# Altium PCB Power Controller In ROV V1.0.PcbDoc
Units mil, origin at the board's own origin, x right, y up, seen from the top; angles counter-clockwise.
Board outline 2303.15 x 6301.1 mil, 2 copper layers (Top Layer, Bottom Layer); 26 components, 24 nets, 92 pads, 6 vias.
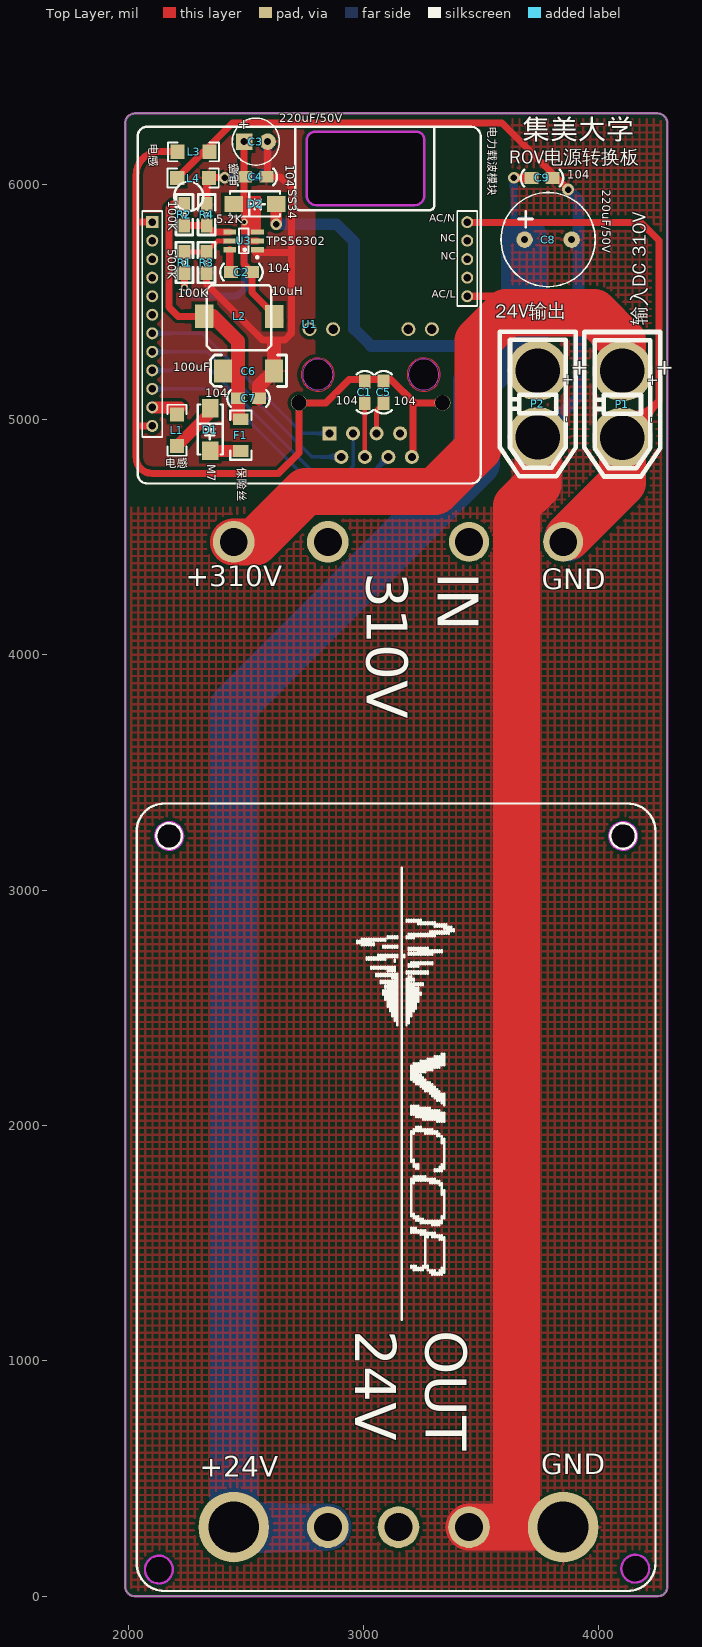
[diagram p0: Top Layer view]
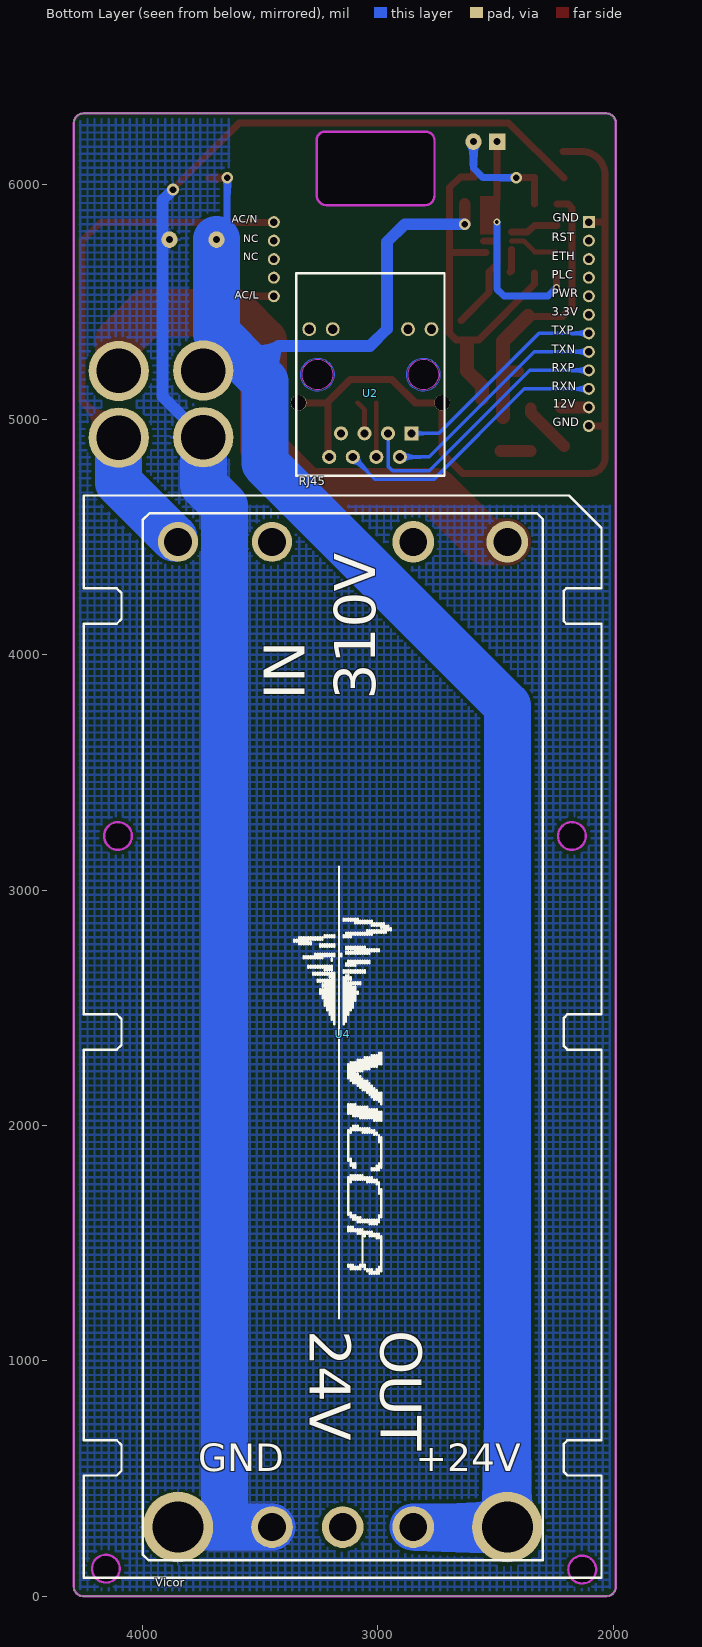
[diagram p1: Bottom Layer view, seen from below]

## Layer stack, top to bottom
Top Solder: solder mask 0.4, Solder Resist, Dk 3.5
Top Layer: signal copper 1.4
Dielectric 1: dielectric 12.6, FR-4, Dk 4.8
Bottom Layer: signal copper 1.4
Bottom Solder: solder mask 0.4, Solder Resist, Dk 3.5

## Board outline
1988.19,39.37 ccw(c2027.56,39.37) 2027.56,0 4251.97,0 ccw(c4251.97,39.37) 4291.34,39.37 4291.34,6260.83 4291.34,6259.84 ccw(c4250.08,6259.84) 4250.08,6301.1 2029.45,6301.1 ccw(c2029.45,6259.84) 1988.19,6259.84
cut-out: 2174.78,3289.45 cw(c2174.78,3230.4) 2233.83,3230.4 cw(c2174.78,3230.4) 2174.78,3171.34 cw(c2174.78,3230.4) 2115.72,3230.4 cw(c2174.78,3230.4)
cut-out: 4103.78,3289.45 cw(c4103.78,3230.4) 4162.83,3230.4 cw(c4103.78,3230.4) 4103.78,3171.34 cw(c4103.78,3230.4) 4044.72,3230.4 cw(c4103.78,3230.4)
cut-out: 2071.8,112.8 ccw(c2130.85,112.8) 2130.85,53.75 ccw(c2130.85,112.8) 2189.91,112.8 ccw(c2130.85,112.8) 2130.85,171.86 ccw(c2130.85,112.8)
cut-out: 4096.4,116.74 ccw(c4155.46,116.74) 4155.46,57.69 ccw(c4155.46,116.74) 4214.51,116.74 ccw(c4155.46,116.74) 4155.46,175.8 ccw(c4155.46,116.74)

## Design rules (kind name [scope] priority, off if disabled: settings)
Clearance [All] p1: gap=15
ComponentClearance [All] p1: gap=0 collisioncheckmode=3 verticalgap=0 showdistances=FALSE
DiffPairsRouting [All] p1: maxlimit=10 minlimit=10 mostfreqgap=10 toplayer_minwidth=15 toplayer_maxwidth=15 toplayer_prefwidth=15 bottomlayer_minwidth=15 bottomlayer_maxwidth=15 bottomlayer_prefwidth=15 maxuncoupledlength=500
PolygonConnect [All] p1: connectstyle=Relief reliefconductorwidth=10 reliefentries=4 polygonreliefangle="90 Angle" airgapwidth=10
RoutingVias [All] p1: holewidth=28 width=50 viastyle="Through Hole" minholewidth=28 minwidth=50 maxholewidth=28 maxwidth=50
SolderMaskExpansion [All] p1: expansion=4
Width [All] p1: maxlimit=500 minlimit=8 preferedwidth=10 minimp=50.000000 maximp=50.000000 favimp=50.000000
28 further rules are at their usual default settings.

## Classes and differential pairs
differential pair EPHY_RX: +EPHY_RX_P -EPHY_RX_N
differential pair EPHY_TX: +EPHY_TX_P -EPHY_TX_N

## Components (designator, comment, footprint, x,y, rotation, side; value= is the part's Value field where it differs from the comment)
C1 "104" 0805C 3005.91,5156.5 r270 top
C2 "104" 0805C 2522.23,5626.75 r180 top
C3 "220uF/50V" RB.1.2 2493.11,6181.1 r0 top
C4 "104" 0805C 2582.68,6031.5 r180 top
C5 "104" 0805C 3085.63,5156.5 r270 top
C6 "100uF" TAJ-C 2403.54,5205.71 r180 top
C7 "104" 0805C 2552.17,5090.55 r180 top
C8 "220uF/50V" RB.2.4 3685.04,5764.76 r0 top
C9 "104" 0805C 3799.21,6026.57 r180 top
D1 "M7" SMA/DO-214AC 2350.39,4874.02 r90 top
D2 "SS34" SMA/DO-214AC 2623.03,5917.32 r180 top
F1 "保险丝" FUSE-1206 2481.3,5000 r270 top
L1 "电感" 1206L 2210.63,4877.95 r90 top
L2 "10uH" 电感 2616.14,5436.02 r180 top
L3 "电感" 1206L 2201.77,6134.84 r0 top
L4 "电感" 1206L 2353.35,6029.53 r180 top
P1 "输入DC 310V" XT60-F#1 4100.39,5197.83 r270 top
P2 "24V输出" XT60-F#2 3741.14,5227.36 r270 top
R1 "500K" 0805R 2238.82,5707.72 r270 top
R2 "100K" 0805R 2240.23,5829.75 r90 top
R3 "100K" 0805R 2334.64,5626.75 r90 top
R4 "5.2K" 0805R 2333.23,5910.72 r270 top
U1 "电力载波模块" 电力载波模块6410 2061.02,6244.09 r0 top locked
U2 "RJ45" RJ45 3264.76,5191.93 r180 bottom
U3 "TPS56302" SOT23-6 2548.23,5720.75 r180 top
U4 "Vicor" vicor 3129,2211 r180 bottom

## Footprints (in the part's own frame and the unit in brackets; to place one, negate y for a bottom-side part, rotate by r counter-clockwise, add the part's x,y. Pads: shape width x height; smd on the part's side, far side on the other; paste and mask are expansions set on the pad)
0805C [mil]
  rect 60x50 smd: 1(-5,0) 2(85,0)
  silkscreen extent -50,-35 131,36, body extent -16,-26 102,29, height 37
0805R [mil]
  rect 60x50 smd: 1(-4.51,1.2) 2(85.49,1.2)
  silkscreen extent -46,-36 126,37, body extent -1,-23 78,26, height 18
1206L [mil]
  rect 60x60 smd: 1(9.1,3.2) 2(144.1,3.2)
  silkscreen extent -32,-37 185,43, body extent 12,-28 138,35, height 24
FUSE-1206 [mil]
  rect 50x65 smd: 1(-1,-2) 2(134,-2)
  silkscreen extent -39,-47 172,43, body extent 1,-36 127,28, height 34
RB.1.2 [mil]
  rect 70x70 hole 30: 1(0,0)
  round 70 hole 30: 2(100,0)
  silkscreen extent -50,-100 150,100, body extent -28,-73 130,85, height 278
RB.2.4 [mil]
  round 70 hole 30: 1(0,0) 2(200,0)
  silkscreen extent -100,-200 300,200, body extent -110,-218 316,207, height 512
RJ45 [mil]
  rect 60x60 hole 35: 1(408.65,-250.74)
  round 60 hole 35: 2(358.65,-350.74) 3(308.65,-250.74) 4(258.65,-350.74) 5(208.65,-250.74) 6(158.65,-350.74) 7(108.65,-250.74) 8(58.65,-350.74)
  round 59.06 hole 40.16: 9(493.29,192.17) 12(-26.39,192.17)
  round 59.05 hole 40.16: 10(393.45,192.17) 11(73.45,192.17)
  round 66.93 hole 64.96: 13(538.57,-120.74) 14(-71.67,-120.74)
  round 116.14 hole 127.95: MH3(8.42,-1.24) MH3(458.42,-1.24)
  Keep-Out Layer circle w2: c8.49,-0.74 r64.96
  Keep-Out Layer circle w2: c458.49,-0.74 r64.96
  Multi-Layer circle w5: c458.42,-1.24 r70.8
  Multi-Layer circle w5: c8.42,-1.24 r70.8
  silkscreen extent -82,-431 548,429, body extent -82,-417 543,425, height 551
SMA/DO-214AC [mm]
  rect 2x1.75 smd: 1(-0.178,0.025) 2(4.422,0.025)
  silkscreen extent -0.58,-1.32 4.82,1.38, body extent -0.38,-1.32 4.73,1.35, height 2.12
SOT23-6 [mm]
  rect 1.4x0.55 smd: 1(-0.051,-0.025) 2(-0.051,-0.975) 3(-0.051,-1.925) 4(2.949,-1.925) 5(2.949,-0.975) 6(2.949,-0.025)
  silkscreen extent -0.15,-2.31 1.96,0.91, body extent 0.07,-2.47 2.88,0.53, height 1.15
TAJ-C [mm]
  rect 1.905x2.5 smd: 1(0,0) 2(-5.505,-0.025)
  silkscreen extent -6.86,-1.73 1.35,1.65, body extent -5.77,-1.68 0.22,1.52, height 2.6
vicor [mm] "V300A24T500"
  round 4.5 hole 3: 1(17.269,57.638) 2(7.109,57.638) 6(-8.131,-48.707) 7(-0.511,-48.707) 8(7.109,-48.707)
  round 4.318 hole 3: 3(-8.131,57.638) 4(-18.291,57.638)
  round 7.62 hole 5.5: 5(-18.291,-48.707) 9(17.269,-48.707)
  silkscreen extent -28.45,-54.19 27.43,62.65, body extent -28.49,-54.13 27.39,62.71, height 15
XT60-F#1 [mm]
  round 6.5 hole 4.8: 1(-0.221,0.009) 2(6.979,0.009)
  silkscreen extent -4.42,-4.09 11.18,4.11, body extent -4.52,-4.05 11.38,4.1, height 16.5
XT60-F#2 [mm]
  round 6.5 hole 4.8: 1(0.489,0) 2(7.689,0)
  silkscreen extent -3.71,-4.1 11.89,4.1, body extent -3.81,-4.06 12.09,4.09, height 16.5
电力载波模块6410 [mm]
  round 1.3 hole 0.8: 0(35.059,-16.289) 2(1.059,-12.289) 3(1.059,-14.289) 4(1.059,-16.289) 5(1.059,-18.289) 6(1.059,-20.289) 7(1.059,-22.289) 8(1.059,-24.289) 9(1.059,-26.289) 10(1.059,-28.289) 11(1.059,-30.289) 12(1.059,-32.289) 13(35.059,-18.289) 14(35.059,-14.289) 15(35.059,-12.289) 16(35.059,-10.289)
  rect 1.3x1.3 hole 0.8: 1(1.059,-10.289)
  Keep-Out Layer board cut-out: 17.729,-7.417 17.729,-1.46 17.8,-1.106 18.001,-0.805 18.301,-0.604 18.656,-0.533 18.656,-0.533 29.567,-0.533 29.567,-0.533 29.998,-0.649 30.314,-0.965 30.429,-1.396 30.429,-1.396 30.429,-7.404 30.349,-7.808 30.121,-8.15 29.779,-8.378 29.375,-8.458 29.375,-8.458 18.771,-8.458 18.372,-8.379 18.034,-8.153 17.808,-7.815 17.729,-7.417
  Keep-Out Layer lines w0.254: 17.729,-7.417 ccw(c18.771,-7.417) 18.771,-8.458 29.375,-8.458 ccw(c29.375,-7.404) 30.429,-7.404 30.429,-1.396 ccw(c29.567,-1.396) 29.567,-0.533 18.656,-0.533 ccw(c18.656,-1.46) 17.729,-1.46 17.729,-7.417
  silkscreen extent -0.5,-38.5 36.5,0, body extent -0.15,-33.42 36.3,-8.87, height 4.35
电感 [mm]
  rect 2x2.5 smd: 1(-0.12,-0.044) 2(7.423,-0.069)
  silkscreen extent 0.19,-3.42 7.17,3.58, body extent 0.64,-2.98 6.64,3.02, height 4.5

## Part data
C1 C2 C4 C5 C7 C9: library part Cap1, "无极贴片电容"
C3 C8: library part Cap3, "直插极性电容"
C6: library part "Pol Cap", "极性贴片电容"
D1 D2: library part Diode, "二极管"
F1: library part Fuse
L1 L3 L4: library part L
L2: library part L, "电感"
P1 P2: library part 接线端子-2PIN, "2PIN"
R1 R2 R3 R4: library part Res, "电阻"
U1: library part 电力载波模块6410
U3: library part TPS54302
U4: library part 滨达模块（220V--24V）

## Via types
v1: diameter 50, hole 28, Top Layer to Bottom Layer, 4 vias
v2: diameter 30, hole 16, Top Layer to Bottom Layer, 2 vias

## Nets (pads, with @x,y where several pads share a name; then routed paths per layer and width w, separated by ;. In a path a pad name is that pad's centre, name@x,y a point inside that pad or via, vN(x,y) a via of type N, cw(c..) or ccw(c..) an arc to the next point about the centre after c; other vN are vias at no path point)
12.0V: C6.1 C7.2 F1.1 L2.2 R2.2 | length 1232.8
  Top Layer w30: R2.2 2189.84,5915.24 2174.21,5899.61 2174.21,5477.36 2212.83,5438.74 L2.2@2361.28,5438.74
  Top Layer w50: C6.1 2466.18,5205.71 2467.17,5204.72
  Top Layer w60: L2.2@2361.28,5438.74 2467.17,5332.86 2467.17,5204.72 C7.2 F1.1@2467.17,5010.46
24.0V: C8.1 C9.2 D2.1 P2.1 U4.8 U4.9 | length 8199.2
  Top Layer w30: v1@3642.72,6026.57 C9.2 C9.2@3719.13,6026.57
  Top Layer w50: v1(2630.03,5829.83) D2.1
  Bottom Layer w30: v1(3639.76,6027.56) 3639.76,5815.94 3685.04,5770.67 C8.1
  Bottom Layer w50: v1(2630.03,5829.83) 2885.72,5829.83 2960.63,5754.92 2960.63,5384.84 3032.48,5312.99 3422.24,5312.99 3527.14,5208.09
  Bottom Layer w200: U4.8 U4.9 2449.12,3783.76 3479.9,4814.54 3479.9,5160.85 3527.14,5208.09 3685.04,5365.99 C8.1
310.0V: P1.1 U1.13 U4.1 | length 2664.6
  Top Layer w30: U1.13 3606.3,5524.06
  Top Layer w200: U4.1 2540.27,4480.23 2754.92,4694.88 3305.12,4694.88 3486.22,4875.98 3486.22,5333.66 3606.3,5453.74 3980.31,5453.74 4100.76,5333.29 P1.1
DGND: C1.1 C5.1 L3.1 U1.1 U1.12 U2.8 U2.13 U2.14 | length 3601.3
  Top Layer w30: U1.12 2035.87,4972.88 ccw(c2035.87,4971.46) 2034.45,4971.46 ; U1.1 2040.8,5839.02 2034.45,5832.68 ; L3.1@2213.58,6139.54 2134.45,6139.54 ccw(c2134.45,6039.54) 2034.45,6039.54 2034.45,5832.68 ; U2.8 3211.12,4846.19 3211.12,5064.46 3217.84,5071.19 U2.14 3216.21,5071.19 3118.03,5169.37 2939.06,5169.37 2840.87,5071.19 U2.13 2726.2,4858.09 2639.76,4771.65 2100.77,4771.65 cw(c2100.77,4837.98) 2034.45,4837.98 2034.45,4971.46 ; 2034.45,4971.46 2034.45,5832.68
EPHY_RX_N: U1.10 U2.6 | length 1201.2
  Bottom Layer w15: U1.10 2377.51,5130.36 2760.83,4747.05 3011.98,4747.05 U2.6
EPHY_RX_P: U1.9 U2.3 | length 1177.6
  Bottom Layer w15: U1.9 2353.89,5209.1 2780.51,4782.48 2937.01,4782.48 2956.12,4801.59 U2.3
EPHY_TX_N: U1.8 U2.2 | length 988.4
  Bottom Layer w15: U1.8 2334.2,5287.84 2780.86,4841.19 U2.2
EPHY_TX_P: U1.7 U2.1 | length 929.6
  Bottom Layer w15: U1.7 2314.52,5366.58 2739.91,4941.19 U2.1
GND: C8.2 C9.1 L3.2 L4.2 P2.2 U4.5 U4.6 | length 13156.9
  Top Layer w30: L4.2 2443.75,6260.83 3588.58,6260.83 3870.08,5979.33 v1(3870.08,5977.36)
  Top Layer w200: U4.6 3650.59,293.42 ; P2.2 3741.14,4723.43 3650.54,4632.82 3650.54,293.47 3650.59,293.42 ; U4.5 3650.59,293.42
  Bottom Layer w50: P2.2 3914.37,5097.86 3914.37,5933.07 v1(3870.08,5977.36)
  Bottom Layer w200: U4.6 3650.54,293.42 ; P2.2 3741.14,4722.44 3650.54,4631.83 3650.54,293.42 ; U4.5 3650.54,293.42
N: P1.2 U1.16 U4.4 | length 2785.6
  Top Layer w30: U1.16 3442.47,5837.85 4178.89,5837.85 4255.91,5760.83 4255.91,5078.21 P1.2
  Top Layer w200: U4.4@3872.44,4503.55 4100.76,4731.87 P1.2
  Bottom Layer w200: U4.4@3866.53,4497.64 4100.76,4731.87 P1.2
NetC1_2: C1.2 U2.4 | length 230.4
  Top Layer w20: C1.2 3006.12,5071.28 U2.4
NetC2_1: C2.1 L2.1 U3.2 | length 452.1
  Top Layer w30: U3.2 2506.2,5759.15 2493.11,5746.06 2493.11,5660.87 C2.1 2527.23,5539.27 L2.1@2646.47,5420.02
NetC2_2: C2.2 U3.6 | length 97.1
  Top Layer w30: U3.6 2432.12,5631.86 C2.2
NetC3_1: C3.1 C4.2 D2.2 R1.2 U3.3 | length 898.7
  Top Layer w30: v2(2240.02,5561.02) R1.2 ; C3.1 2493.11,5932.09 2508.86,5916.34
  Bottom Layer w30: v2(2240.02,5561.02) 2276.44,5524.61 2463.58,5524.61 2494.09,5555.12 v2(2494.09,5839.57)
NetC5_2: C5.2 U2.5 | length 142.5
  Top Layer w20: U2.5 3056.12,5041.98 C5.2
NetD1_1: D1.1 F1.2 | length 128.9
  Top Layer w50: D1.1@2350.41,4866 F1.2
NetD1_2: D1.2 L1.1 | length 219.9
  Top Layer w50: L1.1 2349.39,5029.02 D1.2
NetR1_1: R1.1 R3.2 U3.5 | length 211.5
  Top Layer w20: R1.1 R3.2 2380.35,5759.15 U3.5
NetR2_1: R2.1 R4.2 U3.4 | length 205
  Top Layer w30: R2.1 R4.2 2363.12,5796.55 U3.4
PGND: C3.2 C4.1 C6.2 C7.1 L4.1 R3.1 R4.1 U3.1 | length 2319.4
  Top Layer w30: R3.1 2333.43,5576.02 2570.87,5338.58 2666.34,5338.58 2694.4,5366.65 2694.4,5985.72 2648.62,6031.5 C4.1 2593.11,6036.93 C3.2 ; R4.1 L4.1@2334.43,6027.71 ; L4.1@2334.5,6027.78 v1(2411.2,6027.78) ; 2539.37,5710.63 2690.94,5710.63
  Top Layer w60: C7.1 2557.17,5143.6 C6.2 2620.28,5317.91
  Bottom Layer w30: v1(2411.2,6027.78) 2552.39,6027.78 2593.11,6068.5 C3.2
PLC_3.3V: U1.6
PLC_12V: L1.2 U1.11 | length 118.7
  Top Layer w50: U1.11 L1.2@2221.46,5051.62
PLC_ETH: U1.3
PLC_PWR: U1.5
pads on no net: U1.0 U1.2 U1.4 U1.14 U1.15 U2.7 U2.9 U2.10 U2.11 U2.12 U2.MH3 U4.2 U4.3 U4.7

## Polygon pours and split planes (outlines as drawn)
GND on Top Layer "Top Layer-No Net" (hatched 90Degree grid 30 track 10, remove dead copper, pour order 20): 1649.61,5919.29 1649.61,6576.18 cw(c1749.61,6576.18) 1749.61,6676.18 2198.82,6676.18 4509.25,6676.18 cw(c4509.25,6576.18) 4609.25,6576.18 4609.25,4313.98 4609.25,-179.53 cw(c4509.25,-179.53) 4509.25,-279.53 3429.13,-279.53 1734.84,-279.53 cw(c1734.84,-179.53) 1634.84,-179.53 1634.84,183.07
PGND on Top Layer "Top Layer-No Net" (solid, remove dead copper, pour order 14): 1813.98,6463.58 2696.26,6463.58 cw(c2696.26,6363.58) 2796.26,6363.58 2796.26,6147.64 2796.26,4759.45 cw(c2696.26,4759.45) 2696.26,4659.45 2605.32,4659.45 1916.93,4659.45 cw(c1916.93,4759.45) 1816.93,4759.45 1816.93,4823.82
GND on Bottom Layer "Top Layer-No Net" (hatched 90Degree grid 30 track 10, remove dead copper, pour order 22): 1606.3,5917.32 1606.3,6572.24 cw(c1706.3,6572.24) 1706.3,6672.24 2522.64,6672.24 4632.28,6672.24 cw(c4632.28,6572.24) 4732.28,6572.24 4732.28,4726.38 4732.28,-160.83 cw(c4632.28,-160.83) 4632.28,-260.83 3400.59,-260.83 1725,-260.83 cw(c1725,-160.83) 1625,-160.83 1625,363.19

## Keep-outs
Keep-Out Layer:
  circle w10: c4155.46,116.74 r59.06
  circle w10: c2130.85,112.8 r59.06
  circle w10: c2174.78,3230.4 r59.06
  circle w10: c4103.78,3230.4 r59.06
  lines w10: 4291.34,6259.84 ccw(c4250.08,6259.84) 4250.08,6301.1 2029.45,6301.1 ccw(c2029.45,6259.84) 1988.19,6259.84 1988.19,39.37 ccw(c2027.56,39.37) 2027.56,0 4251.97,0 ccw(c4251.97,39.37) 4291.34,39.37 4291.34,6260.83

## Other copper
Top Layer:
  rectangle net NetC3_1: 2480.32,5786.42 2564.96,5950.79
  pour cut-out: 1769.68,6547.24 3530.91,6547.24 cw(c3530.91,6447.24) 3630.91,6447.24 3630.91,4725 cw(c3530.91,4725) 3530.91,4625 1893.31,4625 cw(c1893.31,4725) 1793.31,4725 1793.31,6477.36 cw(c1870.08,6477.36) 1870.08,6554.13
Bottom Layer:
  pour cut-out: 1769.68,6555.61 3530.91,6555.61 cw(c3530.91,6455.61) 3630.91,6455.61 3630.91,4733.37 cw(c3530.91,4733.37) 3530.91,4633.37 1893.31,4633.37 cw(c1893.31,4733.37) 1793.31,4733.37 1793.31,6485.73 cw(c1870.08,6485.73) 1870.08,6562.5

## Silkscreen, mask and mechanical layers (free items; w line width, h text height)
Top Overlay:
  drawing of 293 lines, arcs and shapes, not listed
  text "集美大学" at 3675.2,6162.4 h150
  text "ROV电源转换板" at 3619.09,6066.93 h100
  text "IN / 310V" at 2957.68,4350.39 h300 r270
  text "+310V" at 2246.06,4262.8 h150
  text "GND" at 3758.86,4250 h150
  text "OUT / 24V" at 2907.5,1128.86 h300 r270
  text "GND" at 3756.89,487.2 h150
  text "+24V" at 2304.13,477.36 h150
Bottom Overlay:
  text "GND" at 2256.26,5827.38 h60
  text "AC/N" at 3619.41,5826.54 h55
  text "RST" at 2260.25,5744.44 h60
  text "NC" at 3572.41,5742.54 h55
  text "NC" at 3571.41,5665.54 h55
  text "ETH" at 2260.25,5664.89 h60
  text "PLC" at 2260.25,5586.44 h60
  text "PWR" at 2260.25,5506.89 h60
  text "AC/L" at 3608.41,5503.54 h55
  text "3.3V" at 2260.25,5428.44 h60
  text "TXP" at 2260.2,5348.89 h60
  text "TXN" at 2260.2,5269.89 h60
  text "RXP" at 2260.25,5190.89 h60
  text "RXN" at 2260.25,5111.89 h60
  text "12V" at 2256.32,5036.82 h60
  text "GND" at 2256.26,4958.38 h60

## Text inside footprints (layer, text, board x,y; h text height)
C3: Top Overlay "+" at 2519.11,6217.1 h78.74
P1: Top Overlay "-" at 4258.76,4986.8 h80 r90; Top Overlay "+" at 4266.76,5139.8 h80 r90; Top Overlay "+" at 4332.76,5178.8 h118.11 r90
P2: Top Overlay "-" at 3899.14,4988.36 h80 r90; Top Overlay "+" at 3907.14,5141.36 h80 r90; Top Overlay "+" at 3973.14,5180.36 h118.11 r90
U1: Top Overlay "NC" at 3328.02,5668.09 h55; Top Overlay "NC" at 3327.02,5745.09 h55; Top Overlay "AC/L" at 3291.02,5506.09 h55; Top Overlay "AC/N" at 3280.02,5829.09 h55
U4: Bottom Overlay "GND" at 3763.72,491.55 h200; Bottom Overlay "+24V" at 2838.72,491.55 h200; Bottom Overlay "IN / 310V" at 2952.76,3809.06 h300 r270; Bottom Overlay "OUT / 24V" at 3345.47,1128.94 h300 r90